# Altium PCB PCB1.PcbDoc
Units mil, origin at the board's own origin, x right, y up, seen from the top; angles counter-clockwise.
Board outline 2900 x 2500 mil, 4 copper layers (Top Layer 1, Top Layer, Bottom Layer, Bottom Layer 1), stack 23.756 mil thick; 37 components, 22 nets, 138 pads, 29 vias.
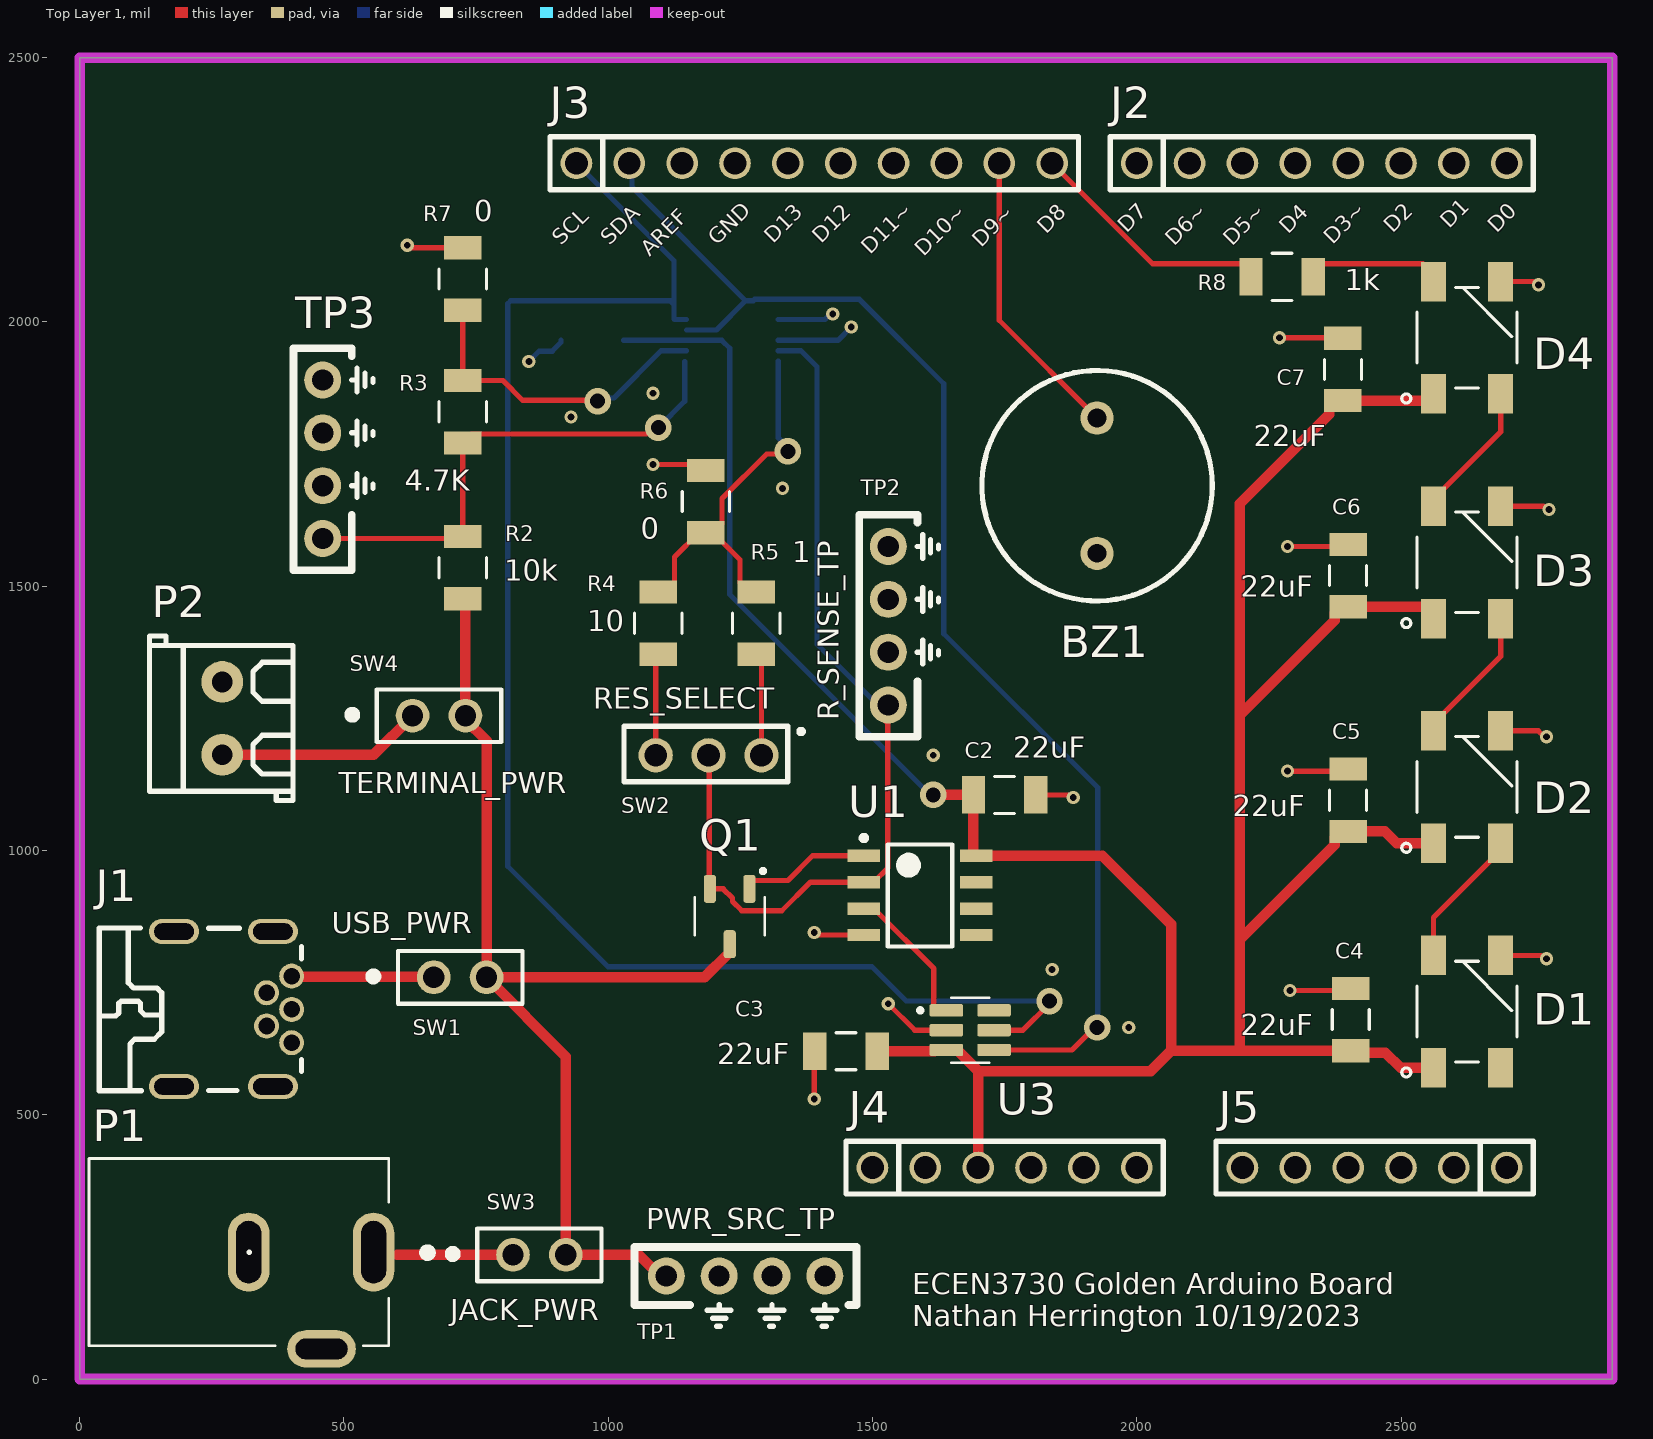
[diagram p0: Top Layer 1 view]
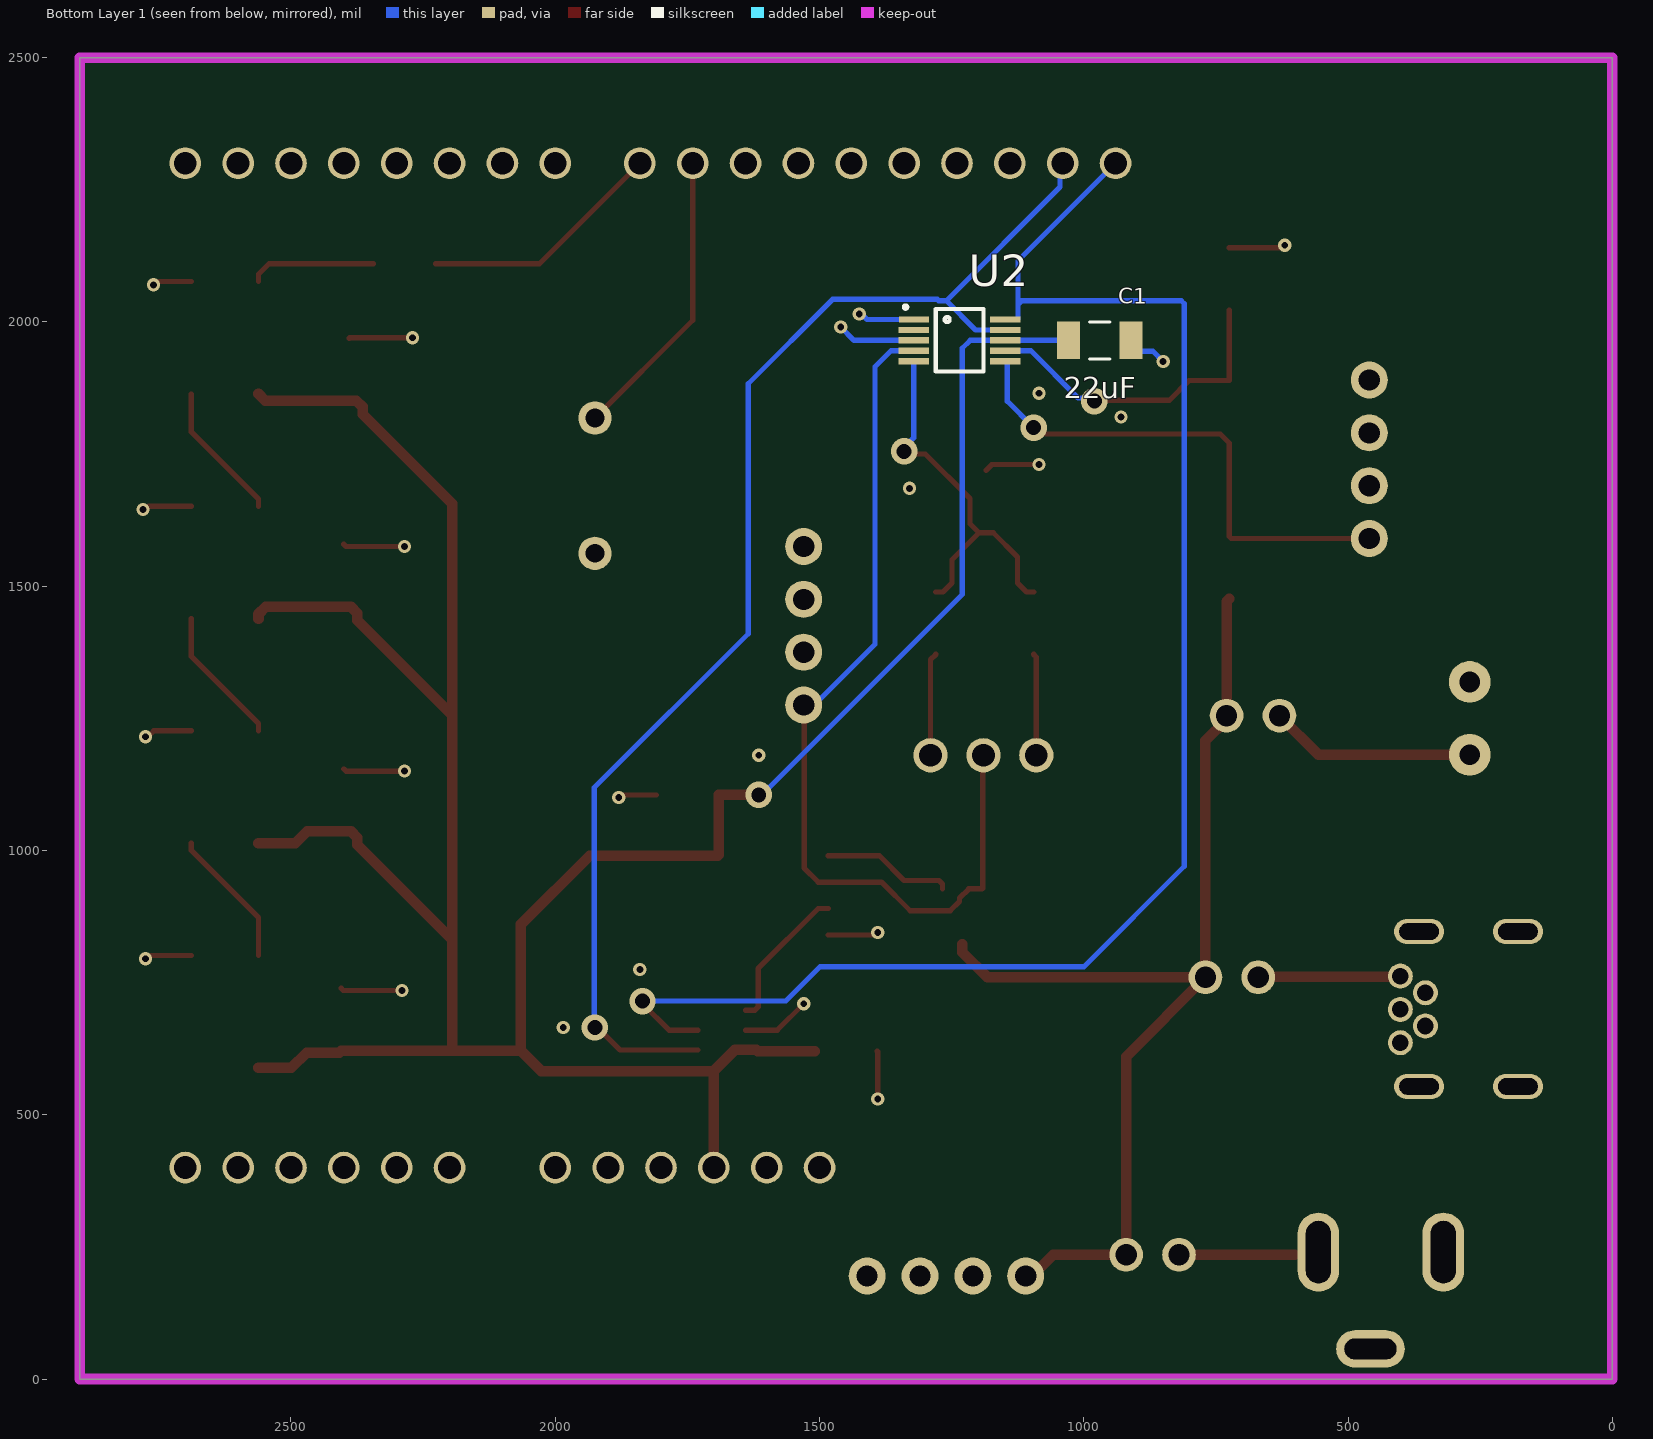
[diagram p1: Bottom Layer 1 view, seen from below]
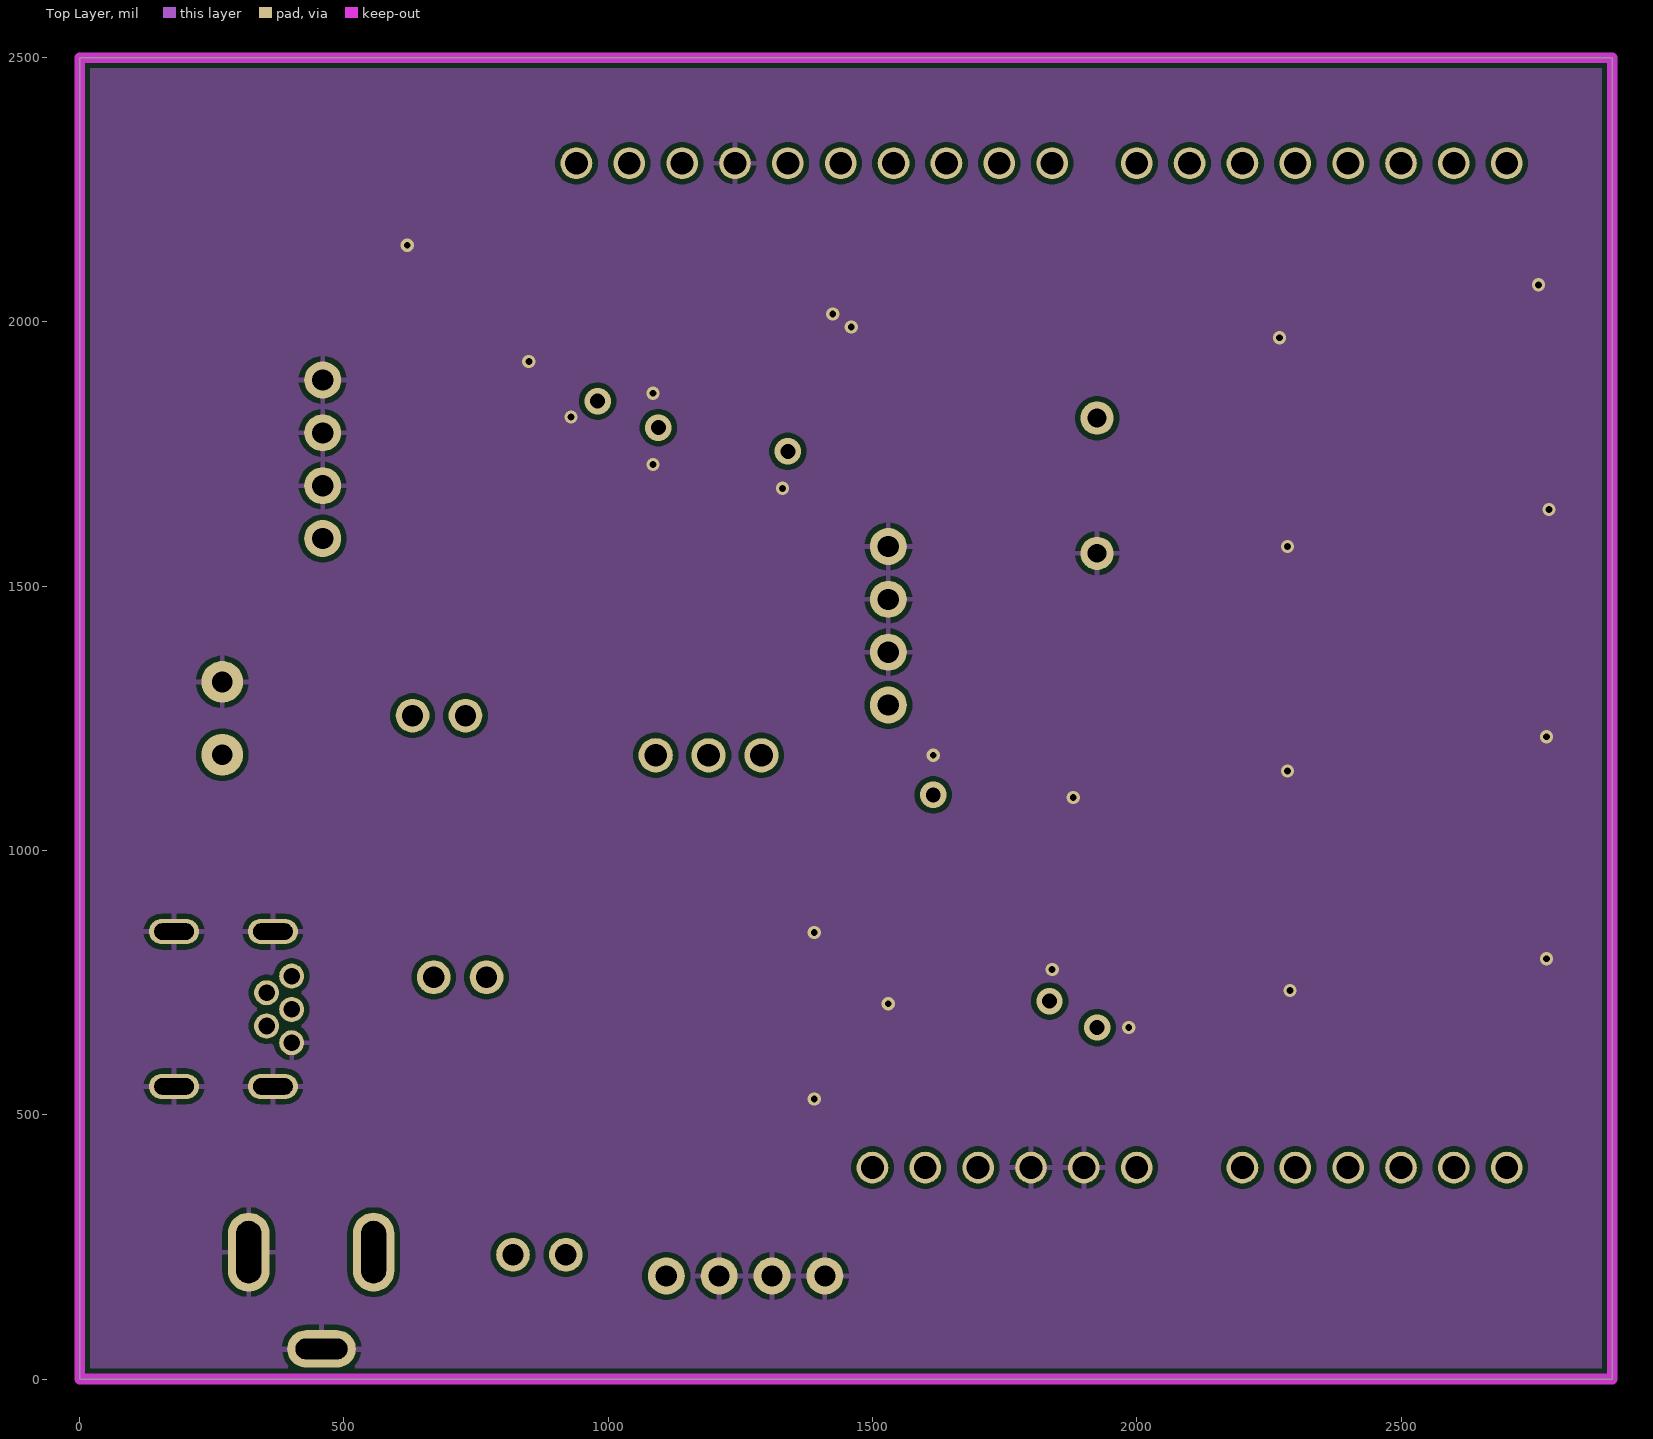
[diagram p2: Top Layer]
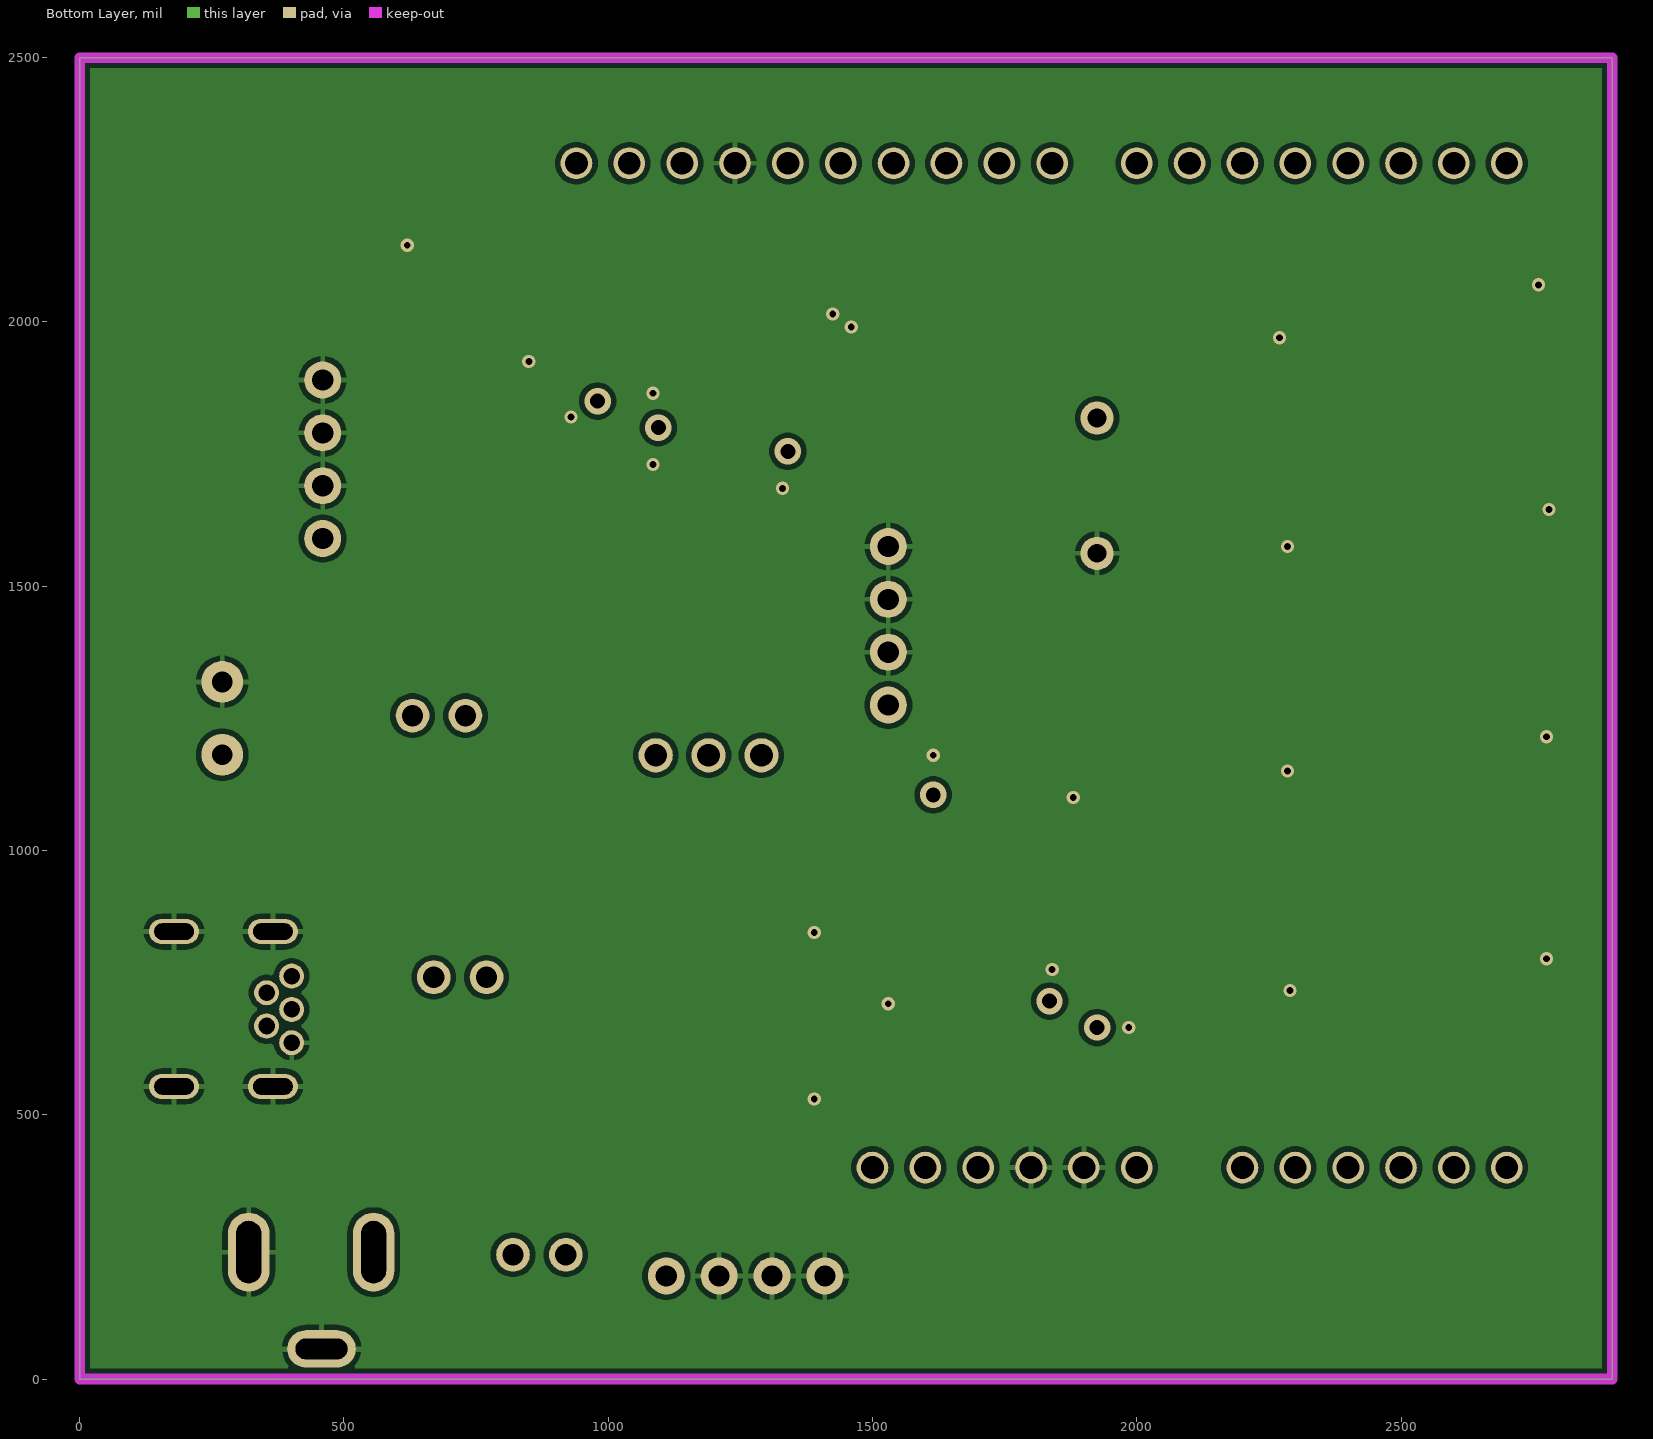
[diagram p3: Bottom Layer]
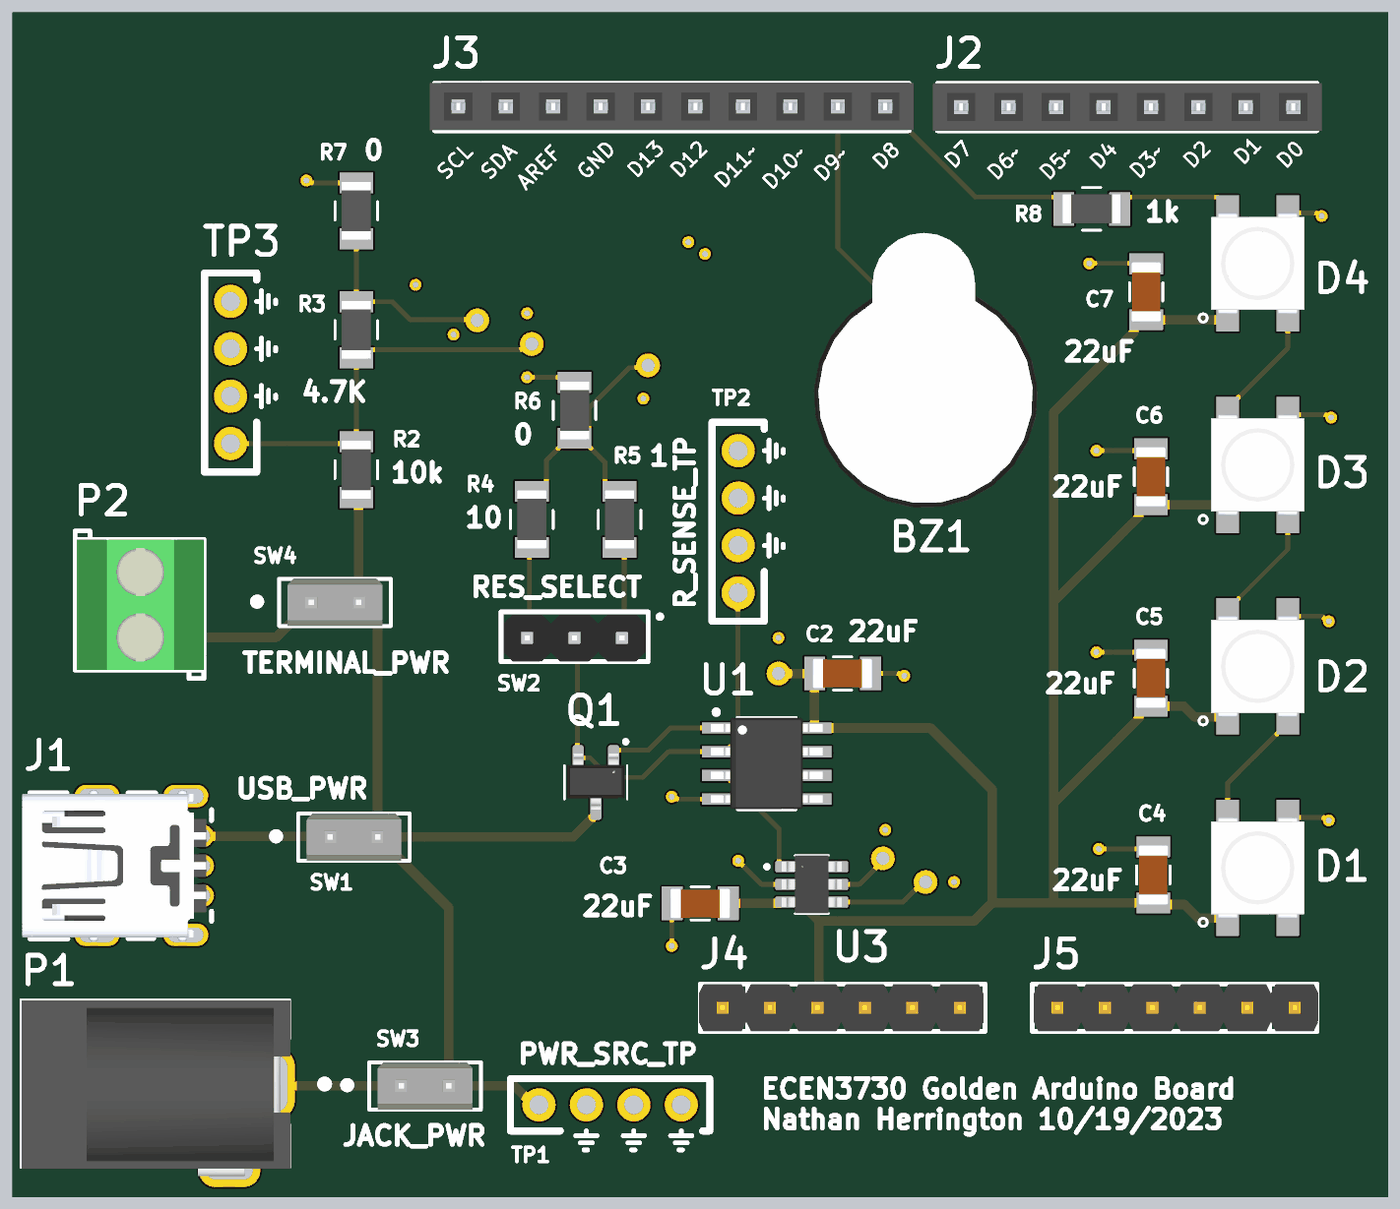
[diagram p4: 3D render of the assembled board from above, using the file's embedded part models]

## Layer stack, top to bottom
Top Solder: solder mask 0.4, Solder Resist, Dk 3.5
Top Layer 1: signal copper 1.378
Dielectric 2: prepreg 2.8, PP-006, Dk 4.1
Top Layer: signal copper 1.4
Dielectric 1: dielectric 12.6, FR-4, Dk 4.8
Bottom Layer: signal copper 1.4
Dielectric 3: prepreg 2.8, PP-006, Dk 4.1
Bottom Layer 1: signal copper 1.378
Bottom Solder: solder mask 0.4, Solder Resist, Dk 3.5

## Board outline
0,0 0,2500 2900,2500 2900,0

## Design rules (kind name [scope] priority, off if disabled: settings)
Clearance [All] p1: gap=10 ignorepadtopadclearanceinfootprint=FALSE except(0: Arc-Hole Track-Hole SMDPad-Hole THPad-Hole Via-Hole Fill-Hole Poly-Hole Region-Hole Text-Hole)
PolygonConnect [All] p1: connectstyle=Relief reliefconductorwidth=10 reliefentries=4 polygonreliefangle="90 Angle" airgapwidth=10
RoutingVias [All] p1: holewidth=28 width=50 viastyle="Through Hole" minholewidth=28 minwidth=50 maxholewidth=28 maxwidth=50
SolderMaskExpansion [All] p1: expansion=4 istentingtop=FALSE
Width "Schematic Width Constraint_4" [InNet('5V')] p1: maxlimit=100 minlimit=10 preferedwidth=20 toplayer_minwidth=20 midlayer1_maxwidth=10 midlayer2_maxwidth=10 minimp=50.000000 maximp=50.000000 favimp=50.000000
Width "Schematic Width Constraint_3" [InNet('pwrSrc')] p2: maxlimit=100 minlimit=10 preferedwidth=20 toplayer_minwidth=20 midlayer1_maxwidth=10 midlayer2_maxwidth=10 bottomlayer_minwidth=20 minimp=50.000000 maximp=50.000000 favimp=50.000000
Width "Schematic Width Constraint_2" [InNet('NetJ1_1')] p3: maxlimit=100 minlimit=10 preferedwidth=20 toplayer_minwidth=20 midlayer1_maxwidth=10 midlayer2_maxwidth=10 bottomlayer_minwidth=20 minimp=50.000000 maximp=50.000000 favimp=50.000000
Width "Schematic Width Constraint_1" [InNet('NetP2_1')] p4: maxlimit=100 minlimit=10 preferedwidth=20 toplayer_minwidth=20 midlayer1_maxwidth=10 midlayer2_maxwidth=10 bottomlayer_minwidth=20 minimp=50.000000 maximp=50.000000 favimp=50.000000
Width "Schematic Width Constraint" [InNet('NetP1_1')] p5: maxlimit=100 minlimit=10 preferedwidth=20 toplayer_minwidth=20 midlayer1_maxwidth=10 midlayer2_maxwidth=10 bottomlayer_minwidth=20 minimp=50.000000 maximp=50.000000 favimp=50.000000
Width [All] p6: maxlimit=10 minlimit=10 preferedwidth=10
30 further rules are at their usual default settings.

## Components (designator, comment, footprint, x,y, rotation, side; value= is the part's Value field where it differs from the comment)
BZ1 "AT-1224-TWT-5V-2-R" "BUZZER- TH" 1925,1690 r0 top
C1 "22uF" 1206_Passive_Capacitor 970,1965 r180 bottom
C2 "22uF" 1206_Passive_Capacitor 1750,1105 r0 top
C3 "22uF" 1206_Passive_Capacitor 1450,620 r180 top
C4 "22uF" 1206_Passive_Capacitor 2405,680 r270 top
C5 "22uF" 1206_Passive_Capacitor 2400,1095 r270 top
C6 "22uF" 1206_Passive_Capacitor 2400,1520 r270 top
C7 "22uF" 1206_Passive_Capacitor 2390,1910 r270 top
D1 "IN-PI55QATPRPGPBPW" "SERIAL_LED - duplicate" 2625,695 r90 top
D2 "IN-PI55QATPRPGPBPW" "SERIAL_LED - duplicate" 2625,1120 r90 top
D3 "IN-PI55QATPRPGPBPW" "SERIAL_LED - duplicate" 2625,1545 r90 top
D4 "IN-PI55QATPRPGPBPW" "SERIAL_LED - duplicate" 2625,1970 r90 top
J1 "USB Mini" USB_MINI_B 290,700 r270 top value="USB mini B"
J2 "PPTC081LFBN-RC" 8_PIN_ARD-DIG_100MIL 2000,2300 r0 top value=Female
J3 "PPTC101LFBN-RC" 10_PIN_ARDUINO_100MIL 940,2300 r0 top value=Female
J4 "MALE" 6_PIN_100MIL-Male 1500,400 r0 top
J5 "MALE" 6_PIN_100MIL-Male 2700,400 r180 top
P1 "Power Jack" Power_Jack 556.22,240 r180 top value="CONN PWR JACK 2X5.5MM SOLDER"
P2 "2P Screw Terminal Block" "P_Terminal block 3.5mm-pitch" 270,1250 r90 top
Q1 "AO3400A" N-MOSFET 1230,875 r270 top value="N channel"
R2 "10k" 1206_Passive_Resitor 725,1535 r90 top value=10KOhm
R3 "4.7K" 1206_Passive_Resitor 725,1830 r270 top value=4.7KOhm
R4 "10" 1206_Passive_Resitor 1095,1430 r90 top value="10 Ohm"
R5 "1" 1206_Passive_Resitor 1280,1430 r90 top value=1Ohm
R6 "0" 1206_Passive_Resitor 1185,1660 r90 top value="0 Ohm"
R7 "0" 1206_Passive_Resitor 725,2081 r90 top value="0 Ohm"
R8 "1k" 1206_Passive_Resitor 2275,2085 r0 top value="1K Ohm"
SW1 "USB_PWR" 2Pin-Header-Conn 670,760 r0 top
SW2 "RES_SELECT" 3_PIN_100mil 1290,1180 r180 top value="CONN HEADER VERT 3POS 2.54MM"
SW3 "JACK_PWR" 2Pin-Header-Conn 820,235 r0 top
SW4 "TERMINAL_PWR" 2Pin-Header-Conn 630,1255 r0 top
TP1 "PWR_SRC_TP" TP10x_Probe 1260,195 r0 top
TP2 "R_SENSE_TP" TP10x_Probe 1530,1425 r90 top
TP3 "10x Probe TP" TP10x_Probe 460,1740 r90 top
U1 "MCP6002T-I/SN" SOIC127P600X175-8N 1590,915 r0 top
U2 "ADS1115IDGSR" ADC_ADS1115IDGSR 1235,1965 r180 bottom
U3 "DAC IC" MCP4725 1685,660 r0 top

## Footprints (in the part's own frame and the unit in brackets; to place one, negate y for a bottom-side part, rotate by r counter-clockwise, add the part's x,y. Pads: shape width x height; smd on the part's side, far side on the other; paste and mask are expansions set on the pad)
2Pin-Header-Conn [mm]
  round 1.62 hole 1.02: 1(0,0) 2(2.54,0)
  silkscreen extent -3.02,-1.27 4.26,1.26, body extent -1.27,-1.27 3.81,1.27, height 8.13
3_PIN_100mil [mm]
  round 1.65 hole 1.1: 1(0,0) 2(2.54,0) 3(5.08,0)
  silkscreen extent -2,-1.4 6.6,1.27, body extent -1.14,-1.27 6.48,1.27, height 8.38
6_PIN_100MIL-Male [mil]
  round 60 hole 43.31: 1(0,0) 2(100,0) 3(200,0) 4(300,0) 5(400,0) 6(500,0)
  silkscreen extent -50,-50 550,50, body extent -53,-50 547,50, height 337
8_PIN_ARD-DIG_100MIL [mil]
  round 60 hole 43.31: 1(0,0) 2(100,0) 3(200,0) 4(300,0) 5(400,0) 6(500,0) 7(600,0) 8(700,0)
  silkscreen extent -50,-50 750,50, body extent -60,-50 760,50, height 335
10_PIN_ARDUINO_100MIL [mil]
  round 60 hole 43.31: 1(0,0) 2(100,0) 3(200,0) 4(300,0) 5(400,0) 6(500,0) 7(600,0) 8(700,0) 9(800,0) 10(900,0)
  silkscreen extent -50,-50 950,50, body extent -60,-49 960,51, height 335
1206_Passive_Capacitor [mil]
  rect 44x71 smd: 1(-59,0) 2(59,0)
  silkscreen extent -19,-35 19,35, body extent -63,-31 63,31, height 50
1206_Passive_Resitor [mil]
  rect 44x71 smd: 1(-59,0) 2(59,0)
  silkscreen extent -19,-45 19,45, body extent -61,-31 61,31, height 26
ADC_ADS1115IDGSR [mm] "*SOP50P490X110-10N"
  rect 1.45x0.3 smd mask+0.025: 1(-2.2,1)
  rect 1.47x0.3 smd mask+0.025: 2(-2.2,0.5) 3(-2.2,0) 4(-2.2,-0.5) 5(-2.2,-1) 6(2.2,-1) 7(2.2,-0.5) 8(2.2,0) 9(2.2,0.5) 10(2.2,1)
  silkscreen extent -2.68,-1.5 1.15,1.68, body extent -2.44,-1.49 2.46,1.51, height 1.1
"BUZZER- TH" [mm]
  round 1.6 hole 0.9: 1(0,3.25) 2(0,-3.25)
  silkscreen extent -5.53,-5.54 5.54,5.54, body extent -6,-6 6,8.75, height 9.05
MCP4725 [mm]
  rrect25% 1.61x0.59 smd: 1(-1.145,0.95) 2(-1.145,0) 3(-1.145,-0.95) 4(1.145,-0.95) 5(1.145,0) 6(1.145,0.95)
  silkscreen extent -2.5,-1.56 0.9,1.56, body extent -1.6,-1.55 1.6,1.55, height 1.45
N-MOSFET [mm]
  rrect50% 1.35x0.59 smd: 1(-1.33,0.95) 2(-1.33,-0.95) 3(1.33,0)
  silkscreen extent -2.28,-1.68 0.89,1.7, body extent -1.55,-1.55 1.45,1.55, height 1.25
"P_Terminal block 3.5mm-pitch" [mm]
  round 2 hole 1: 1(-1.75,0) 2(1.75,0)
  silkscreen extent -3.95,-3.4 3.95,3.5, body extent -3.5,-3.4 3.5,3.4, height 8.4
Power_Jack [mm]
  oval 2x3.8 hole 1.2 slot 3 at 90 deg: 1(0,0) 2(6,0)
  oval 3.3x1.8 hole 1 slot 2.5 at 0 deg: 3(2.5,4.65)
  silkscreen extent -2.79,-4.5 13.68,4.5, body extent -0.76,-4.45 13.64,4.95, height 11.49
"SERIAL_LED - duplicate" [mil] "Footprint for serial LED"
  rect 74.8x47.5 smd: 1(-106.3,63.5) 2(-106.3,-63.5) 3(106.3,-63.5) 4(106.3,63.5)
  silkscreen extent -124,-94 95,124, body extent -106,-98 106,98, height 63
SOIC127P600X175-8N [mm] "SOIC, 8-Leads, Body 4.90x3.90mm, Pitch 1.27mm, IPC Medium Density"
  rect 1.55x0.6 smd: 1(-2.7,1.905) 2(-2.7,0.635) 3(-2.7,-0.635) 4(-2.7,-1.905) 5(2.7,-1.905) 6(2.7,-0.635) 7(2.7,0.635) 8(2.7,1.905)
  silkscreen extent -2.82,-2.45 1.55,2.88, body extent -3,-2.45 3,2.45, height 1.75
TP10x_Probe [mil] "Small Probs footprint"
  round 70 hole 40: 1(-150,0) 2(-50,0) 2(50,0) 2(150,0)
  silkscreen extent -210,-95 210,55
USB_MINI_B [mm]
  round 1.2 hole 0.8: 1(-1.58,2.826) 2(-0.78,1.622) 3(0.02,2.826) 4(0.82,1.622) 5(1.62,2.826)
  oval 1.2x2.4 hole 0.8 slot 1.9 at 90 deg: 6(-3.72,1.924) 7(3.72,1.924) 8(-3.72,-2.826) 9(3.72,-2.826)
  silkscreen extent -3.89,-6.42 3.93,3.3, body extent -4.04,-6.83 4.06,3.02, height 3.98

## Part data
BZ1: library part BUZZER_1, "Buzzers Transducer, Externally Driven Electromechanical/Magnetic 5 V 40mA 2.4kHz 87dB @ 5V, 10cm Through Hole PC Pins", Datasheet=https://www.puiaudio.com/media/SpecSheet/AT-1224-TWT-5V-2-R.pdf, MFR Part #=AT-1224-TWT-5V-2-R
C1 C2 C3 C4 C5 C6 C7: library part C_22uF_1206, "22uF ±10% 25V X5R 1206 Multilayer Ceramic Capacitors MLCC - SMD/SMT RoHS", LCSC Part#=C12891, MFR Part #=CL31A226KAHNNNE, Datasheet=https://datasheet.lcsc.com/lcsc/1811031514_Samsung-Electro-Mechanics-CL31A226KAHNNNE_C12891.pdf, Type=basic
D1 D2 D3 D4: library part LED_Smart, "LIGHT EMITTING DIODES (LED) RGB 620~630NM RED, 520~530NM GREEN, 465~475NM BLUE 600MCD@16MARED,1200MCD@16MAGREEN,300MCD@16MABLUE TOP VIEW SMD-4 ROHS", LCSC Part#=C2843785, Manufacturer=XINGLIGHT, MFR Part #=XL-5050RGBC-WS2812B, Datasheet=https://datasheet.lcsc.com/lcsc/2301111130_XINGLIGHT-XL-5050RGBC-WS2812B_C2843785.pdf
J1: library part J_USB_B_Mini, "Through Hole USB Connectors RoHS", LCSC Part#=C46398, MFR Part #=920-462A2021D10102, Datasheet=https://datasheet.lcsc.com/szlcsc/2103081233_Jing-Extension-of-the-Electronic-Co-920-462A2021D10102_C46398.pdf, Type=Extended
J2: library part JF_8_PIN_FEMA_ARD-Dig, "8 Position Header Connector 0.100\" (2.54mm) Through Hole Tin", LCSC Part#=C27438, Digikey Link=https://www.digikey.com/product-detail/en/PPTC081LFBN-RC/S7006-ND/810147/?itemSeq=304982354, MFR Part #=PPTC081LFBN-RC, Type=Extended
J3: library part JF_10_PIN_FEMA_ARDUINO, "10 Position Header Connector 0.100\" (2.54mm) Through Hole Tin", LCSC Part#=C225507, Digikey Link=https://www.digikey.com/product-detail/en/PPTC101LFBN-RC/S7008-ND/810149/?itemSeq=304982352, MFR Part #=PPTC101LFBN-RC, Type=Extended
J4 J5: library part JM_6_PIN_MALE, "Male header- 6 pin 1 row- through Hole", LCSC Part#=C37208, Datasheet=https://datasheet.lcsc.com/szlcsc/1810312320_BOOMELE-Boom-Precision-Elec-C37208_C37208.pdf, Type=Extended
P1: library part "P_Power Jack", "Power Barrel Connector Jack 2.10mm ID (0.083\"), 5.50mm OD (0.217\") Through Hole, Right Angle", LCSC Part#=C136744, MFR Part #=PJ-102A, Digikey Link=https://www.digikey.com/product-detail/en/PJ-102A/CP-102A-ND/275425/?itemSeq=304982367, Type=Extended
P2: library part "P_Terminal block", "Green Straight pin 3.5mm  pitch; P=3.5mm  Screw terminal ROHS", LCSC Part#=C474892, Manufacturer="Cixi Kefa Elec", MFR Part #=KF350-3.5-2P, Datasheet=https://datasheet.lcsc.com/lcsc/2001160007_Cixi-Kefa-Elec-KF350-3-5-2P_C474892.pdf
Q1: library part Q_Nch_MOSFET, "MOSFET N Trench 30V 5.7A 1.5V @ 250uA 26.5 m? @ 5.7A,10V SOT-23-3L RoHS", LCSC Part#=C20917, Datasheet=https://datasheet.lcsc.com/szlcsc/Alpha-Omega-Semicon-AOS-AO3400A_C20917.pdf, MFR Part #=AO3400A, Type=Basic
R2: library part R_10KOhm_1206, "10 kOhms ±5% 0.25W, 1/4W Chip Resistor 1206 (3216 Metric) Automotive AEC-Q200 Thick Film", LCSC Part#=C17902, MFR Part #=RMCF1206FT10K0, Digikey Link=https://www.digikey.com/en/products/detail/stackpole-electronics-inc/RMCF1206FT10K0/1759669, Type=Basic
R3: library part R_4.7k_1206, "4.7kΩ ±1% 0.25W ±100ppm/℃ 1206 Chip Resistor - Surface Mount RoHS", LCSC Part#=C17936, MFR Part #=1206W4F4701T5E, Datasheet=https://datasheet.lcsc.com/lcsc/1810301414_UNI-ROYAL-Uniroyal-Elec-1206W4F4701T5E_C17936.pdf, Type=Basic
R4: library part R_10Ohm_1206, "CHIP RESISTOR - SURFACE MOUNT 0.1OHMS ±1% 1/4W 1206 ROHS", LCSC Part#=C17903, MFR Part #=1206W4F100JT5E, Datasheet=https://datasheet.lcsc.com/szlcsc/Uniroyal-Elec-1206W4F100JT5E_C17903.pdf, Type=Basic
R5: library part R_1Ohm_1206, "1Ω ±5% 0.25W ±400ppm/℃ 1206 Chip Resistor - Surface Mount RoHS", LCSC Part#=C1409, MFR Part #=1206W4J010JT5E, Datasheet=https://datasheet.lcsc.com/lcsc/1810301410_UNI-ROYAL-Uniroyal-Elec-1206W4J010JT5E_C1409.pdf, Type=Extended
R6 R7: library part R_0Ohm_1206, "CHIP RESISTOR - SURFACE MOUNT 0OHMS ±1% 1/4W 1206 ROHS", LCSC Part#=C17888, MFR Part #=1206W4F0000T5E, Datasheet=https://datasheet.lcsc.com/szlcsc/Uniroyal-Elec-1206W4F0000T5E_C17888.pdf, Mouser link=https://www.mouser.com/ProductDetail/Royalohm/1206W4F0000T5E?qs=e8oIoAS2J1Thbopin%252BsagQ%3D%3D, Type=Basic
R8: library part R_1K_1206, "CHIP RESISTOR - SURFACE MOUNT 1KOHMS ±1% 1/4W 1206 ROHS", LCSC Part#=C4410, MFR Part #=RNCP1206FTD1K00CT, Digikey Link=https://www.digikey.com/product-detail/en/RNCP1206FTD1K00/RNCP1206FTD1K00CT-ND/2240675/?itemSeq=304982373, Type=Basic
SW1 SW3 SW4: library part SW_2Pin_100mil_Switch, "2Pin Header", LCSC Part#=C124375, Type=Extended
SW2: library part SW_3Pin_100mil_Switch, "Connector Header Through Hole 3 position 0.100\" (2.54mm)", LCSC Part#=C49257, MFR Part #=PREC003SAAN-RC, Digikey Link=https://www.digikey.com/product-detail/en/PREC003SAAN-RC/S1012EC-03-ND/2774851/?itemSeq=304982371, Type=Extended
TP1 TP2 TP3: library part TP_10x_Probe, "Test Point 300 mil centers"
U1: library part U_MCP6002T-I/SN, "0.6 V/us 2 1MHz 1.8V ~ 6V 100μA General Purpose SOIC-8_150mil  Operational Amplifier ROHS", LCSC Part#=C7377, Mfr=Microchip, Datasheet=https://ww1.microchip.com/downloads/en/DeviceDoc/MCP6001-1R-1U-2-4-1-MHz-Low-Power-Op-Amp-DS20001733L.pdf, MFR Part #=MCP6002T-I/SN, Type=Basic
U2: library part U_ADC_ADS1115IDGSR, "16-Bit ADC with Integrated MUX, PGA, Comparator, Oscillator, and Reference 10-VSSOP -40 to 125", LCSC Part#=C37593, Package="MSOP-10 Texas Instruments", Digikey Link=https://www.digikey.com/product-detail/en/texas-instruments/ADS1115IDGSR/296-38849-1-ND/5142969?utm_source=snapeda&utm_medium=aggregator&utm_campaign=symbol, MFR Part #=ADS1115IDGSR, SnapEDA_Link=https://www.snapeda.com/parts/ADS1115IDGSR/Texas%20Instruments/view-part/?ref=snap, Type=Extended
U3: library part U_MCP4725A0T-E/CH, "IC DAC 12BIT V-OUT SOT23-6", LCSC Part#=C144198, MFR Part #=MCP4725A0T-E/CH, Datasheet=https://ww1.microchip.com/downloads/en/DeviceDoc/22039d.pdf, Type=Extended

## Via types
v1: diameter 25, hole 13, Top Layer 1 to Bottom Layer 1, 23 vias
v2: diameter 50, hole 28, Top Layer 1 to Bottom Layer 1, 6 vias

## Nets (pads, with @x,y where several pads share a name; then routed paths per layer and width w, separated by ;. In a path a pad name is that pad's centre, name@x,y a point inside that pad or via, vN(x,y) a via of type N, cw(c..) or ccw(c..) an arc to the next point about the centre after c; other vN are vias at no path point)
5V: C1.1 C2.1 C3.1 C4.2 C5.2 C6.2 C7.2 D1.1 D2.1 D3.1 D4.1 J4.3 U1.8 U2.8 U3.3 | length 5791.4
  Top Layer 1 w20: C3.1 1617.24,620 1619.84,622.6 U3.3 1660,622.6 1700,582.6 ; v2(1615,1105) C2.1 1691,991.81 1692.81,990 U1.8 1934.95,990 2064.95,860 2064.95,621 ; J4.3 1700,582.6 ; D1.1 2499.27,588.7 2470.5,617.48 2408.52,617.48 C4.2 2195,621 ; D2.1 2491.77,1013.7 2469.48,1036 C5.2 2386.5,1036 2374.5,1024 2374.5,1010.5 2195,831 ; D3.1 2561.5,1447.25 2547.75,1461 C6.2 2386.5,1461 2374.5,1449 2374.5,1435.5 2195,1256 ; D4.1 2548.8,1851 C7.2 2376.5,1851 2364.5,1839 2364.5,1825.5 2195,1656 2195,1256 ; 1700,582.6 2026.55,582.6 2064.95,621 ; 2064.95,621 2195,621 ; 2195,621 2195,831 ; 2195,831 2195,1256
  Bottom Layer 1 w10: C1.1 U2.8 1215,1965 1230,1950 1230,1484.29 1609.29,1105 v2(1615,1105)
BUZZER: BZ1.1 J3.9 | length 564.2
  Top Layer 1 w10: J3.9 1740,2002.95 BZ1.1@1928.9,1814.06
dacOut: U1.3 U3.1 | length 278.3
  Top Layer 1 w10: U1.3 1502.4,890 1616.13,776.27 1616.13,704.02 1622.75,697.4 U3.1
GND: BZ1.2 C1.2 C2.2 C3.2 C4.1 C5.1 C6.1 C7.1 D1.3 D2.3 D3.3 D4.3 J1.5 J1.6 J1.7 J1.8 J1.9 J3.4 J4.4 J4.5 P1.2 P1.3 P2.2 R6.2 R7.2 TP1.2 TP2.2 TP3.2 U1.4 U2.1 U2.3 U3.2 | length 1756.6
  Top Layer 1 w10: v1(620,2145) 624.06,2145 629.06,2140 R7.2 ; v1(1085,1730) 1174,1730 R6.2 ; v1(1390,530) 1390,619 C3.2 ; v1(1390,845) 1394.06,845 1399.06,840 U1.4 ; v1(1530,710) 1580,660 U3.2 ; C2.2 1870.94,1105 1875.94,1100 v1(1880,1100) ; v1(2270,1970) 2389,1970 C7.1 ; v1(2285,1150) 2396,1150 C5.1 ; v1(2285,1575) 2396,1575 C6.1 ; v1(2290,735) 2401,735 C4.1 ; D1.3 2764.64,801.3 2770.94,795 v1(2775,795) ; D2.3 2759.64,1226.3 2770.94,1215 v1(2775,1215) ; D3.3 2769.64,1651.3 2775.94,1645 v1(2780,1645) ; D4.3 2749.64,2076.3 2755.94,2070 v1(2760,2070)
  Bottom Layer 1 w10: v1(850,1925) 869.45,1944.45 894,1944.45 911,1961.45 C1.2 ; U2.3 1435,1965 v1(1460,1990) ; U2.1 1410.31,2004.37 1420.94,2015 v1(1425,2015)
  other v1: 1985,665 1840,775 1615,1180 1330,1685 930,1820 1085,1865
LED: J3.10 R8.1 | length 464.7
  Top Layer 1 w10: J3.10 2030,2110 R8.1@2226,2110
NetD1_4: D1.4 D2.2 | length 265
  Top Layer 1 w10: D1.4 2561.5,873.05 2688.5,1000.05 D2.2
NetD2_4: D2.4 D3.2 | length 265
  Top Layer 1 w10: D2.4 2561.5,1239.95 2688.5,1366.95 D3.2
NetD3_4: D3.4 D4.2 | length 265
  Top Layer 1 w10: D3.4 2561.5,1664.95 2688.5,1791.95 D4.2
NetD4_4: D4.4 R8.2 | length 239.5
  Top Layer 1 w10: R8.2@2344,2110 2541.45,2110 2561.5,2089.95 D4.4
NetJ1_1: J1.1 SW1.1 | length 269.7
  Top Layer 1 w20: J1.1 402.36,761.1 668.9,761.1 SW1.1
NetP1_1: P1.1 SW3.1 | length 225.9
  Top Layer 1 w20: P1.1 P1.1@561.22,235 ; 601.22,235 SW3.1
NetP2_1: P2.1 SW4.1 | length 390.6
  Top Layer 1 w20: P2.1 556.1,1181.1 SW4.1
NetQ1_1: Q1.1 U1.1 | length 247.6
  Top Layer 1 w10: Q1.1 1267.4,936.58 1273.95,943.13 1339.98,943.13 1386.85,990 U1.1
NetR4_1: R4.1 SW2.3 | length 193.1
  Top Layer 1 w10: SW2.3 1090,1366 R4.1
NetR5_1: R5.1 SW2.1 | length 195.1
  Top Layer 1 w10: R5.1 1290,1361 SW2.1
pwrSrc: Q1.3 R2.1 SW1.2 SW3.2 SW4.2 TP1.1 | length 2023
  Top Layer 1 w20: R2.1 730,1471 SW4.2 730,1247.47 770,1207.47 SW1.2 ; TP1.1 1098.08,195 1058.08,235 SW3.2 920,610 SW1.2 ; Q1.3 1230,807.68 1182.32,760 SW1.2
R_Sense_High: Q1.2 SW2.2 TP2.1 U1.2 U2.4 | length 1734.5
  Top Layer 1 w10: SW2.2 1191.3,1178.7 1191.3,928.66 Q1.2 1217.64,927.36 1235.31,909.69 1235.31,903.46 1252.98,885.79 1328.48,885.79 1382.69,940 U1.2 1502.4,940 1529.21,966.81 1529.21,1239.55 1510,1258.76 TP2.1@1510,1275
  Bottom Layer 1 w10: U2.4 1364.68,1945.32 1395,1915 1395,1390 TP2.1@1510,1275
R_Sense_Low: R4.2 R5.2 R6.1 U2.5 | length 743.6
  Top Layer 1 w10: R4.2 1108.5,1489 1125.5,1506 1125.5,1555 1171.5,1601 R6.1 R6.1@1198.5,1601 ; R5.2 1266.5,1489 1249.5,1506 1249.5,1550 R6.1@1198.5,1601 ; v2(1340,1755) 1335,1750 1300,1750 1215.5,1665.5 1215.5,1618 R6.1@1198.5,1601
  Bottom Layer 1 w10: U2.5 1321.61,1780.86 1340,1762.47 v2(1340,1755)
SCL: J3.1 U2.10 U3.5 | length 3040.7
  Top Layer 1 w10: U3.5 1785,660 1835,710 v2(1835,715)
  Bottom Layer 1 w10: J3.1 1124.45,2115.55 1124.45,2032.84 ; U2.10 1125.35,2004.37 1124.45,2005.28 1124.45,2032.84 ; v2(1835,715) 1563.89,715 1498.89,780 1000,780 810,970 810,2034.14 815.86,2040 1117.29,2040 1124.45,2032.84
SDA: J3.2 U2.9 U3.4 | length 2479.5
  Top Layer 1 w10: U3.4 1877.6,622.6 1920,665 v2(1925,665)
  Bottom Layer 1 w10: J3.2 1045,2295 1045,2255 1260,2040 ; U2.9 1204.68,1984.68 1260,2040 ; v2(1925,665) 1926.5,666.5 1926.5,1118.5 1635,1410 1635,1882.8 1475.3,2042.5 1277.5,2042.5 1275,2040 1260,2040
VRM_HIGH: R2.2 R3.2 TP3.1 U2.6 | length 970.8
  Top Layer 1 w10: TP3.1 721,1590 R2.2 R3.2 742,1788 1072.18,1788 1084.18,1800 v2(1095,1800)
  Bottom Layer 1 w10: v2(1095,1800) 1145,1850 U2.6@1145,1924.41
VRM_LOW: R3.1 R7.1 U2.7 | length 612
  Top Layer 1 w10: R7.1 R3.1 801,1889 838.43,1851.57 935,1851.57 978.43,1851.57 v2(980,1850)
  Bottom Layer 1 w10: v2(980,1850) 985.78,1855.78 1010.78,1855.78 1100.32,1945.32 U2.7
pads on no net: D1.2 J1.2 J1.3 J1.4 J2.1 J2.2 J2.3 J2.4 J2.5 J2.6 J2.7 J2.8 J3.3 J3.5 J3.6 J3.7 J3.8 J4.1 J4.2 J4.6 J5.1 J5.2 J5.3 J5.4 J5.5 J5.6 U1.5 U1.6 U1.7 U2.2 U3.6

## Polygon pours and split planes (outlines as drawn)
GND on Top Layer "GND_L02_P000" (solid, pour order 0): 0,2500 2900,2500 2900,0 0,0
GND on Bottom Layer "GND_L03_P001" (solid, pour order 1): 0,2500 2900,2500 2900,0 0,0

## Keep-outs
Keep-Out Layer:
  the board outline again, w20

## Silkscreen, mask and mechanical layers (free items; w line width, h text height)
Top Overlay:
  text "ECEN3730 Golden Arduino Board / Nathan Herrington 10/19/2023" at 1575,100 h40

## Text inside footprints (layer, text, board x,y; h text height)
J2: Top Overlay "D7" at 1981,2166.81 h30 r45; Top Overlay "D6~" at 2071,2142.07 h30 r45; Top Overlay "D4" at 2287,2165 h30 r45; Top Overlay "D3~" at 2371,2145 h30 r45; Top Overlay "D2" at 2484,2167 h30 r45; Top Overlay "D1" at 2591,2175 h30 r45; Top Overlay "D0" at 2681,2166.81 h30 r45; Top Overlay "D5~" at 2181,2142.07 h30 r45
J3: Top Overlay "D8" at 1829,2164.41 h30 r45; Top Overlay "D9~" at 1706,2139.67 h30 r45; Top Overlay "D10~" at 1597,2122 h30 r45; Top Overlay "D11~" at 1496,2125.53 h30 r45; Top Overlay "D12" at 1403,2146.74 h30 r45; Top Overlay "D13" at 1312,2146.74 h30 r45; Top Overlay "GND" at 1206,2143.21 h30 r45; Top Overlay "AREF" at 1079,2122 h30 r45; Top Overlay "SDA" at 1003,2143.21 h30 r45; Top Overlay "SCL" at 911,2143.21 h30 r45